# EAGLE board Secondary Board PCB v9 (EAGLE 9.7.0)
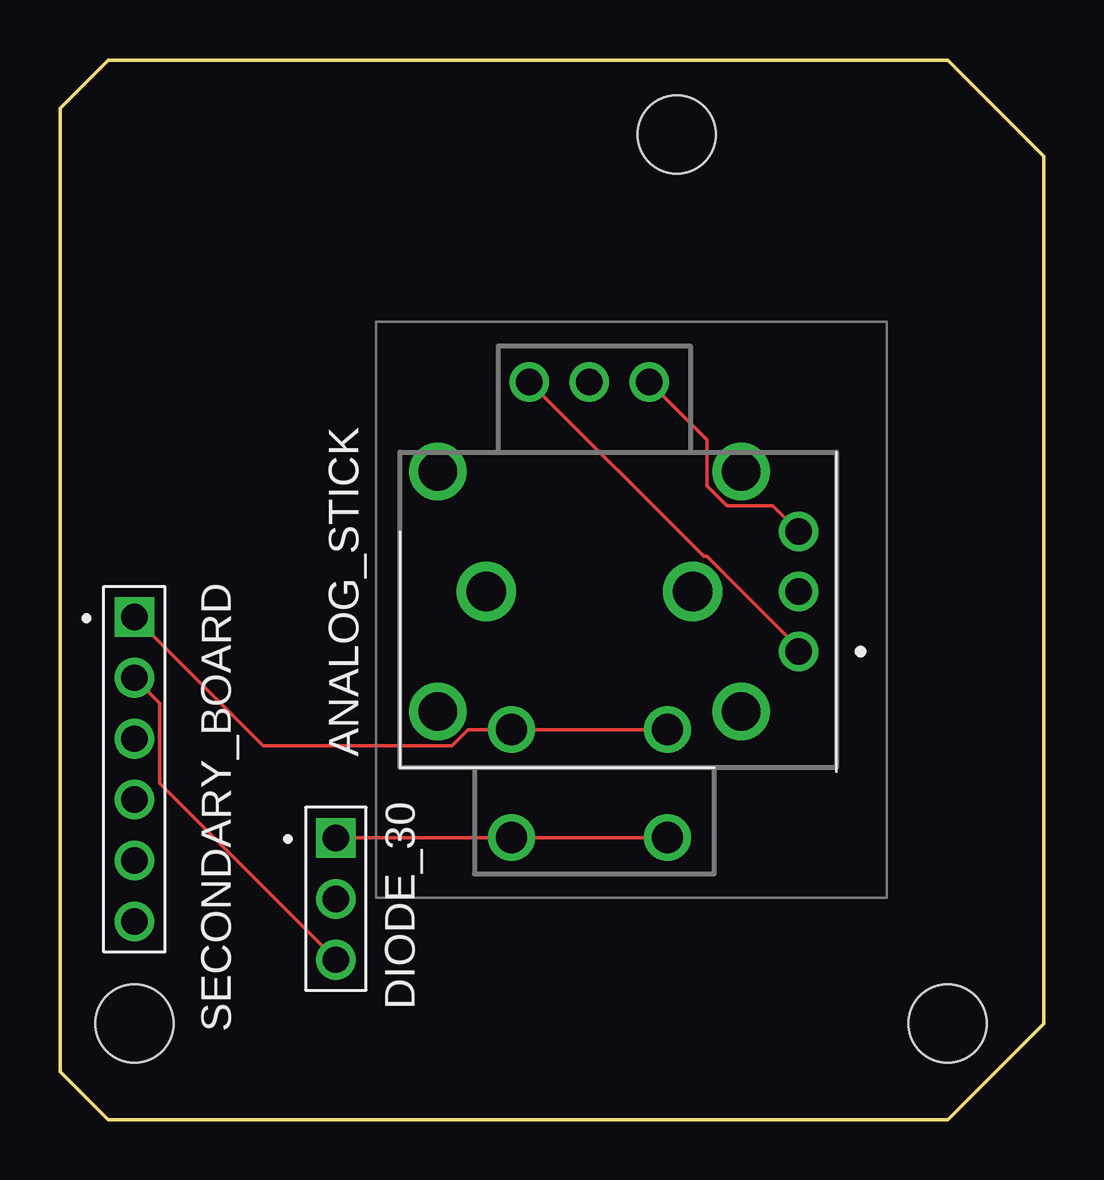
[diagram p0: board, top side]
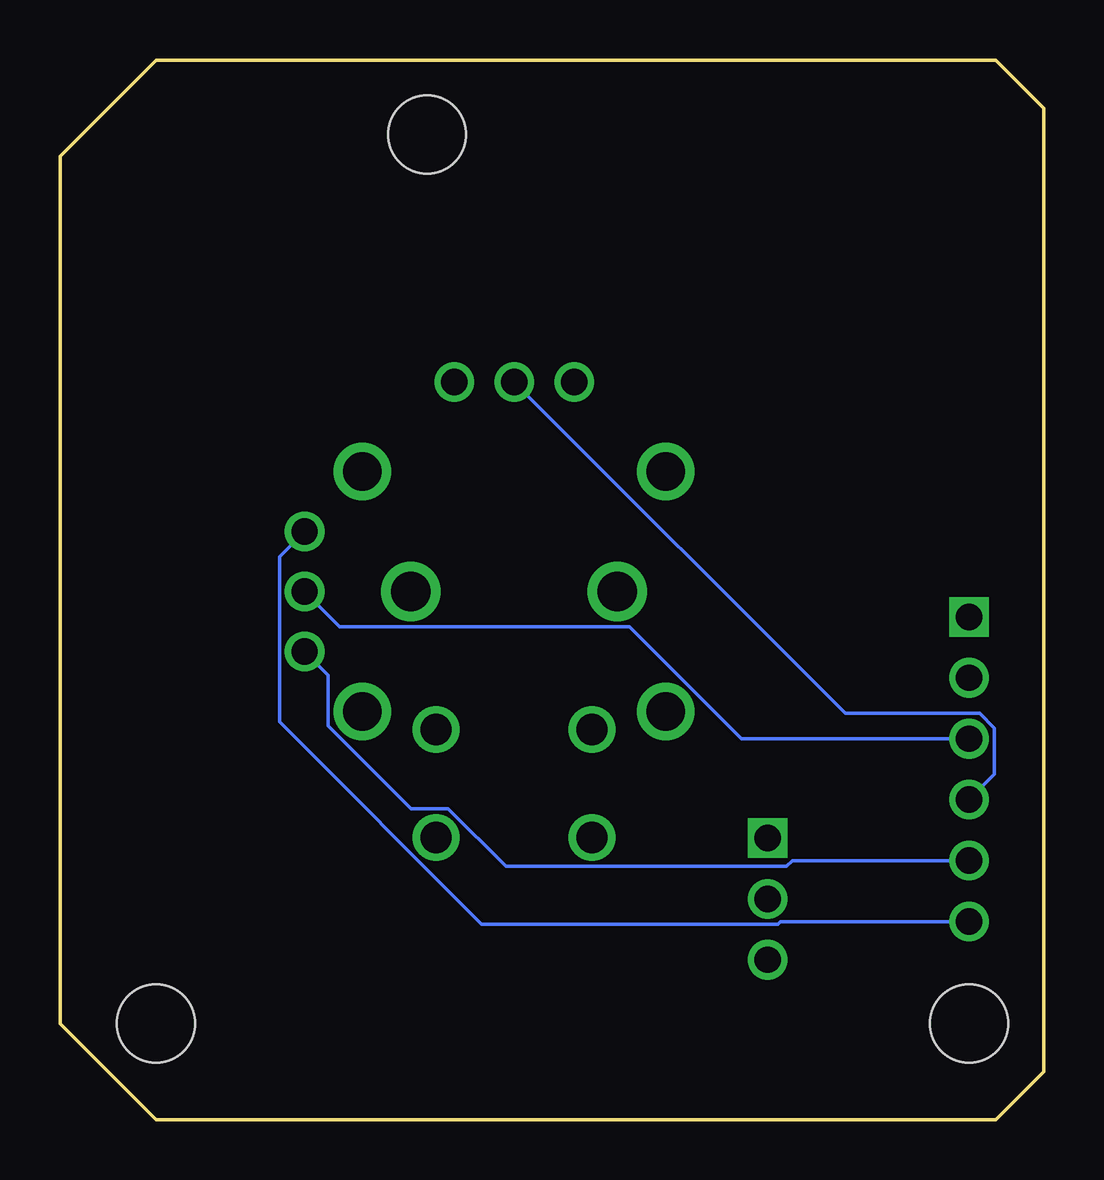
[diagram p1: board, bottom side, seen from below]

Size 41 x 44.15 mm. Coordinates in mm from the lower left corner, seen from the top.
Outline: 0,2 0,42.15 2,44.15 37,44.15 41,40.15 41,4 37,0 2,0 0,2
Copper layers (1*16): Top / Bottom
Stack-up Default Layer Stack: Top User Defined 0.035mm / Dielectric-1 User Defined 1.5mm / Bottom User Defined 0.035mm
Design rules "default": minimum track width 6mil, minimum drill 0.35mm, track to track 6mil, track to pad 6mil, pad to pad 6mil, via to via 6mil, smd to smd 6mil, copper to edge 40mil, drill to drill 6mil, minimum pad ring 10mil, minimum via ring 8mil, stop-mask expansion 4mil, vias tented up to drill 0mil, thermal gap 10mil
Holes 3.25 mm at 3.1,4 25.7,41.05 37,4

## Footprints (pad centres in the part's own frame; a part is rotated, then mirrored left to right if it is on the bottom)
RKJXV122400R = drill 1.3 pad 1.95: A1 -11.98,-3.25; B1 -11.98,-7.75; C1 -5.48,-3.25; D1 -5.48,-7.75 | drill 1.1 pad 1.65: A11 0,0; A12 0,2.5; A13 0,5; B11 -6.23,11.23; B12 -8.73,11.23; B13 -11.23,11.23 | drill 1.6 pad 2.4: MH1 -15.055,-2.5; MH2 -15.055,7.5; MH3 -2.405,-2.5; MH4 -2.405,7.5 | drill 1.65 pad 2.475: MH5 -13.03,2.5; MH6 -4.43,2.5
61300311121 = drill 1.1 square: 1 -2.54,0 | drill 1.1: 2 0,0; 3 2.54,0
61300611121 = drill 1.1 square: 1 -6.35,0 | drill 1.1: 2 -3.81,0; 3 -1.27,0; 4 1.27,0; 5 3.81,0; 6 6.35,0

## Placement (x,y rotation side)
ANALOG_STICK  RKJXV122400R  [RKJXV122400R]  30.8,19.5 0 top
DIODE_30  61300311121  [61300311121]  11.5,9.2 270 top
SECONDARY_BOARD  61300611121  [61300611121]  3.1,14.6 270 top

## Library data of the parts
ANALOG_STICK = SamacSys_Parts; DESCRIPTION: RKJXV122400R; HEIGHT: 18.95mm; MANUFACTURER_NAME: ALPS; MANUFACTURER_PART_NUMBER: RKJXV122400R; MOUSER_PART_NUMBER: 688-RKJXV122400R; MOUSER_PRICE-STOCK: https://www.mouser.co.uk/ProductDetail/ALPS/RKJXV122400R?qs=GedFDFLaBXEbB%252ByoOVwLBg%3D%3D
DIODE_30 = Headers; CREATED_BY: PCBLayout.com; DIGI_KEY_PART_NUMBER: 732-5316-ND; MANUFACTURER: Wurth Electronics Inc.; MPN: 61300311121
SECONDARY_BOARD = Headers; CREATED_BY: PCBLayout.com; DIGI_KEY_PART_NUMBER: 732-5319-ND; MANUFACTURER: Wurth Electronics Inc.; MPN: 61300611121

## Nets
N$1: DIODE_30.3 SECONDARY_BOARD.2
N$2: ANALOG_STICK.A1 ANALOG_STICK.C1 SECONDARY_BOARD.1
N$3: ANALOG_STICK.B1 ANALOG_STICK.D1 DIODE_30.1
N$4: ANALOG_STICK.A13 ANALOG_STICK.B11 SECONDARY_BOARD.6
N$5: ANALOG_STICK.A11 ANALOG_STICK.B13 SECONDARY_BOARD.5
N$6: ANALOG_STICK.A12 SECONDARY_BOARD.3
N$7: ANALOG_STICK.B12 SECONDARY_BOARD.4

## Tracks (layer width: path | path; a pad name or v marks a point on that pad's centre or on a via)
N$1
  Top 0.152: DIODE_30.3 4.15,14.01 4.15,17.36 SECONDARY_BOARD.2
N$2
  Top 0.152: SECONDARY_BOARD.1 8.48,15.57 16.34,15.57 17.02,16.25 ANALOG_STICK.A1 ANALOG_STICK.C1
N$3
  Top 0.152: ANALOG_STICK.D1 ANALOG_STICK.B1 DIODE_30.1
N$4
  Top 0.152: ANALOG_STICK.B11 26.97,28.33 26.97,26.41 27.8,25.57 29.73,25.57 ANALOG_STICK.A13
  Bottom 0.152: SECONDARY_BOARD.6 10.96,8.25 11.06,8.15 23.42,8.15 31.85,16.58 31.85,23.45 ANALOG_STICK.A13
N$5
  Top 0.152: ANALOG_STICK.B13 26.83,23.47 26.98,23.47 30.8,19.64 ANALOG_STICK.A11
  Bottom 0.152: ANALOG_STICK.A11 29.82,18.52 29.82,16.41 26.37,12.95 24.82,12.95 22.41,10.55 10.72,10.55 10.48,10.79 SECONDARY_BOARD.5
N$6
  Bottom 0.152: SECONDARY_BOARD.3 12.6,15.87 17.26,20.53 29.33,20.53 ANALOG_STICK.A12
N$7
  Bottom 0.152: ANALOG_STICK.B12 8.26,16.92 2.66,16.92 2.05,16.31 2.05,14.38 SECONDARY_BOARD.4